# Altium PCB NEMA23.PcbDoc
Units mm, origin at the board's own origin, x right, y up, seen from the top; angles counter-clockwise.
Board outline 56 x 56 mm, 2 copper layers (Top Layer, Bottom Layer); 19 components, 9 nets, 59 pads, 26 vias.
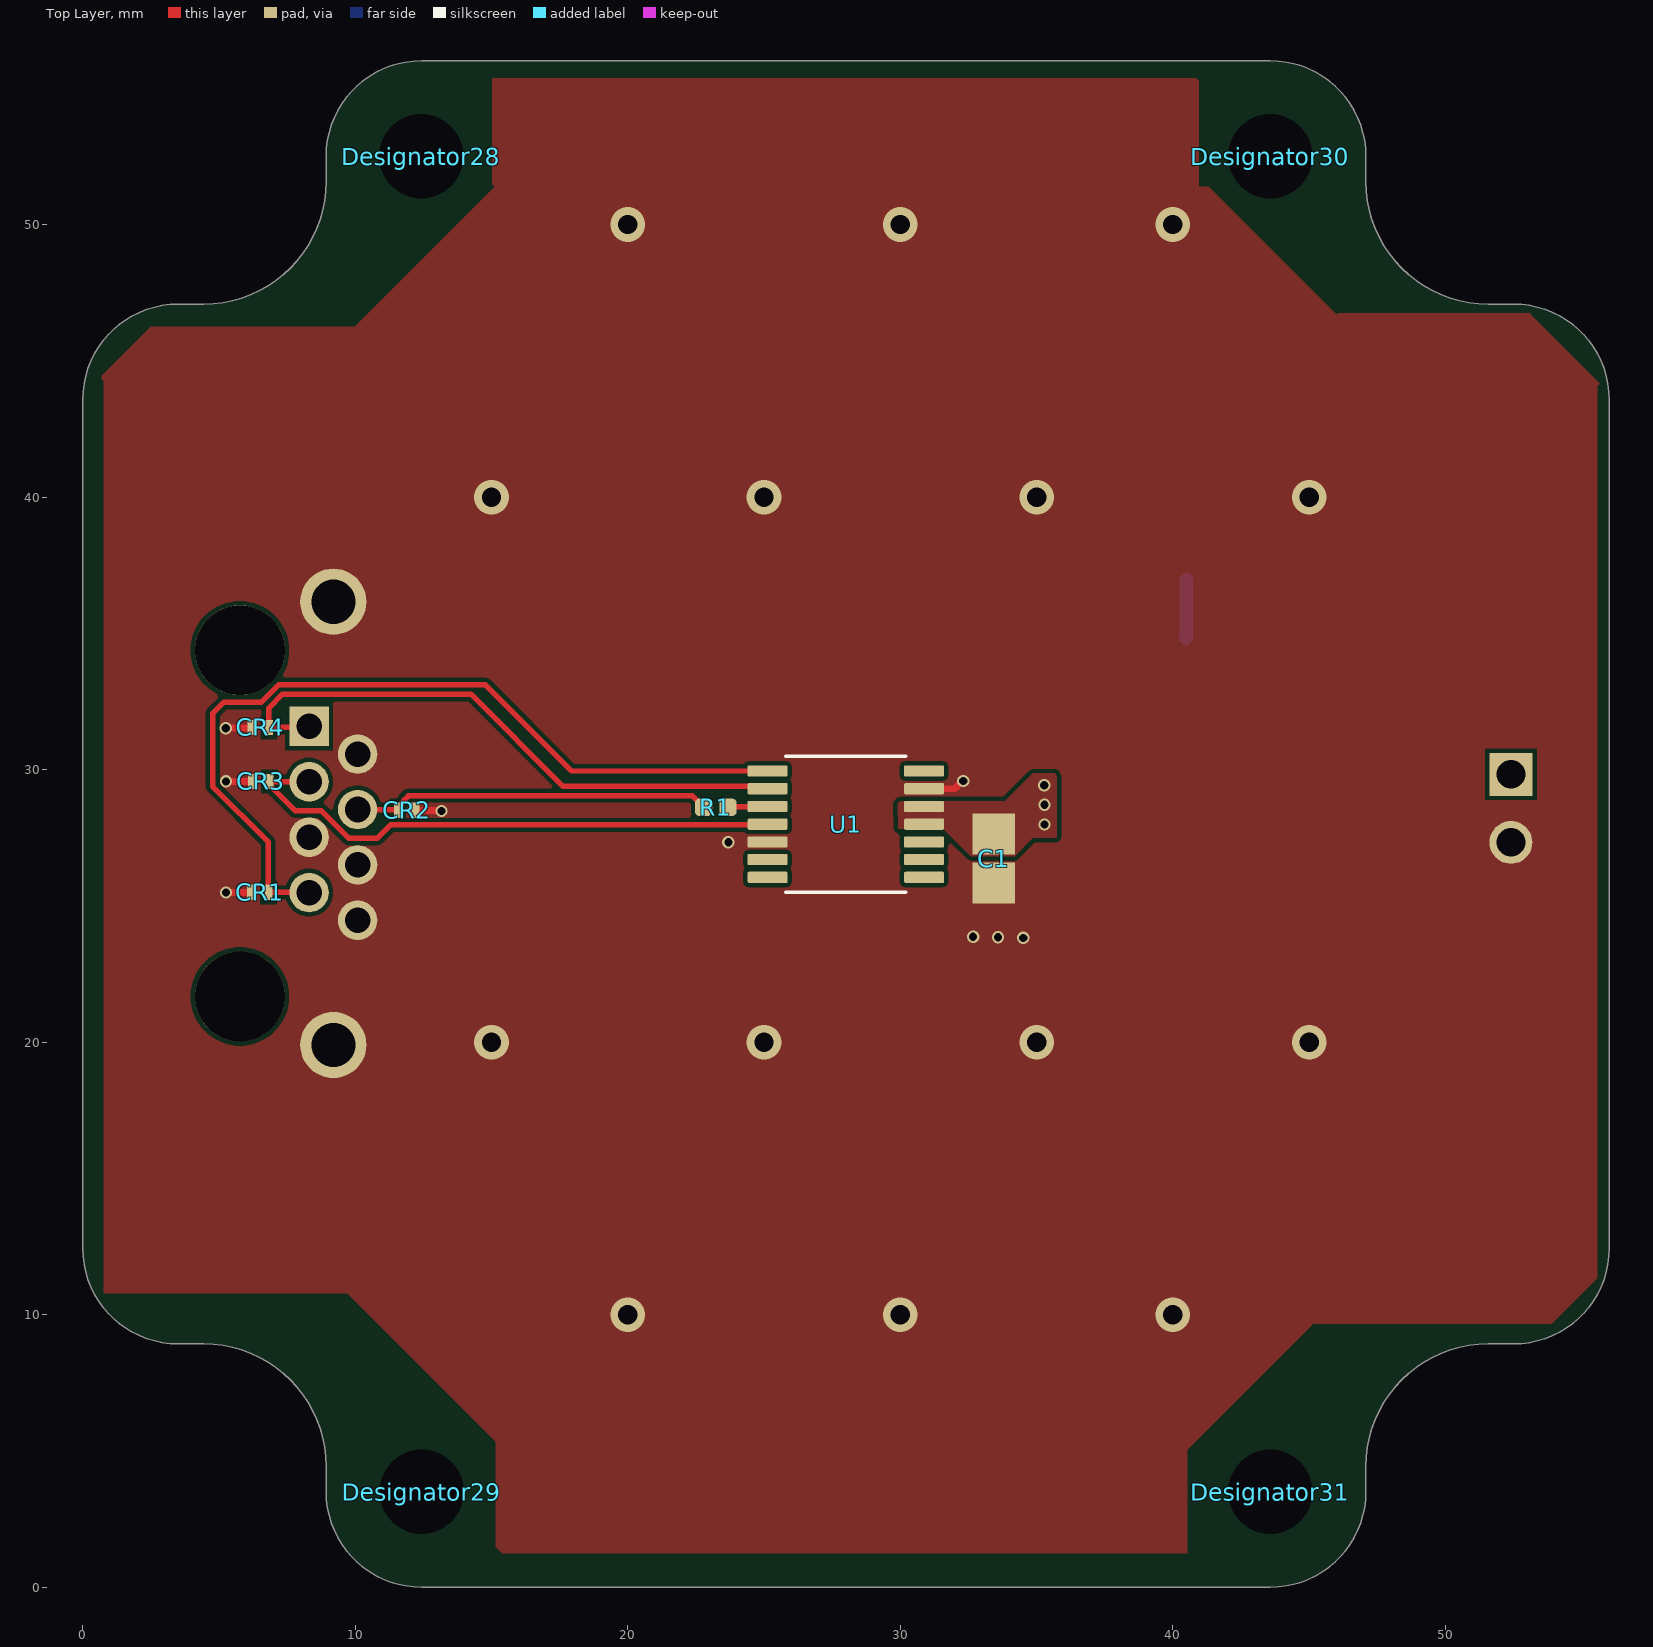
[diagram p0: Top Layer view]
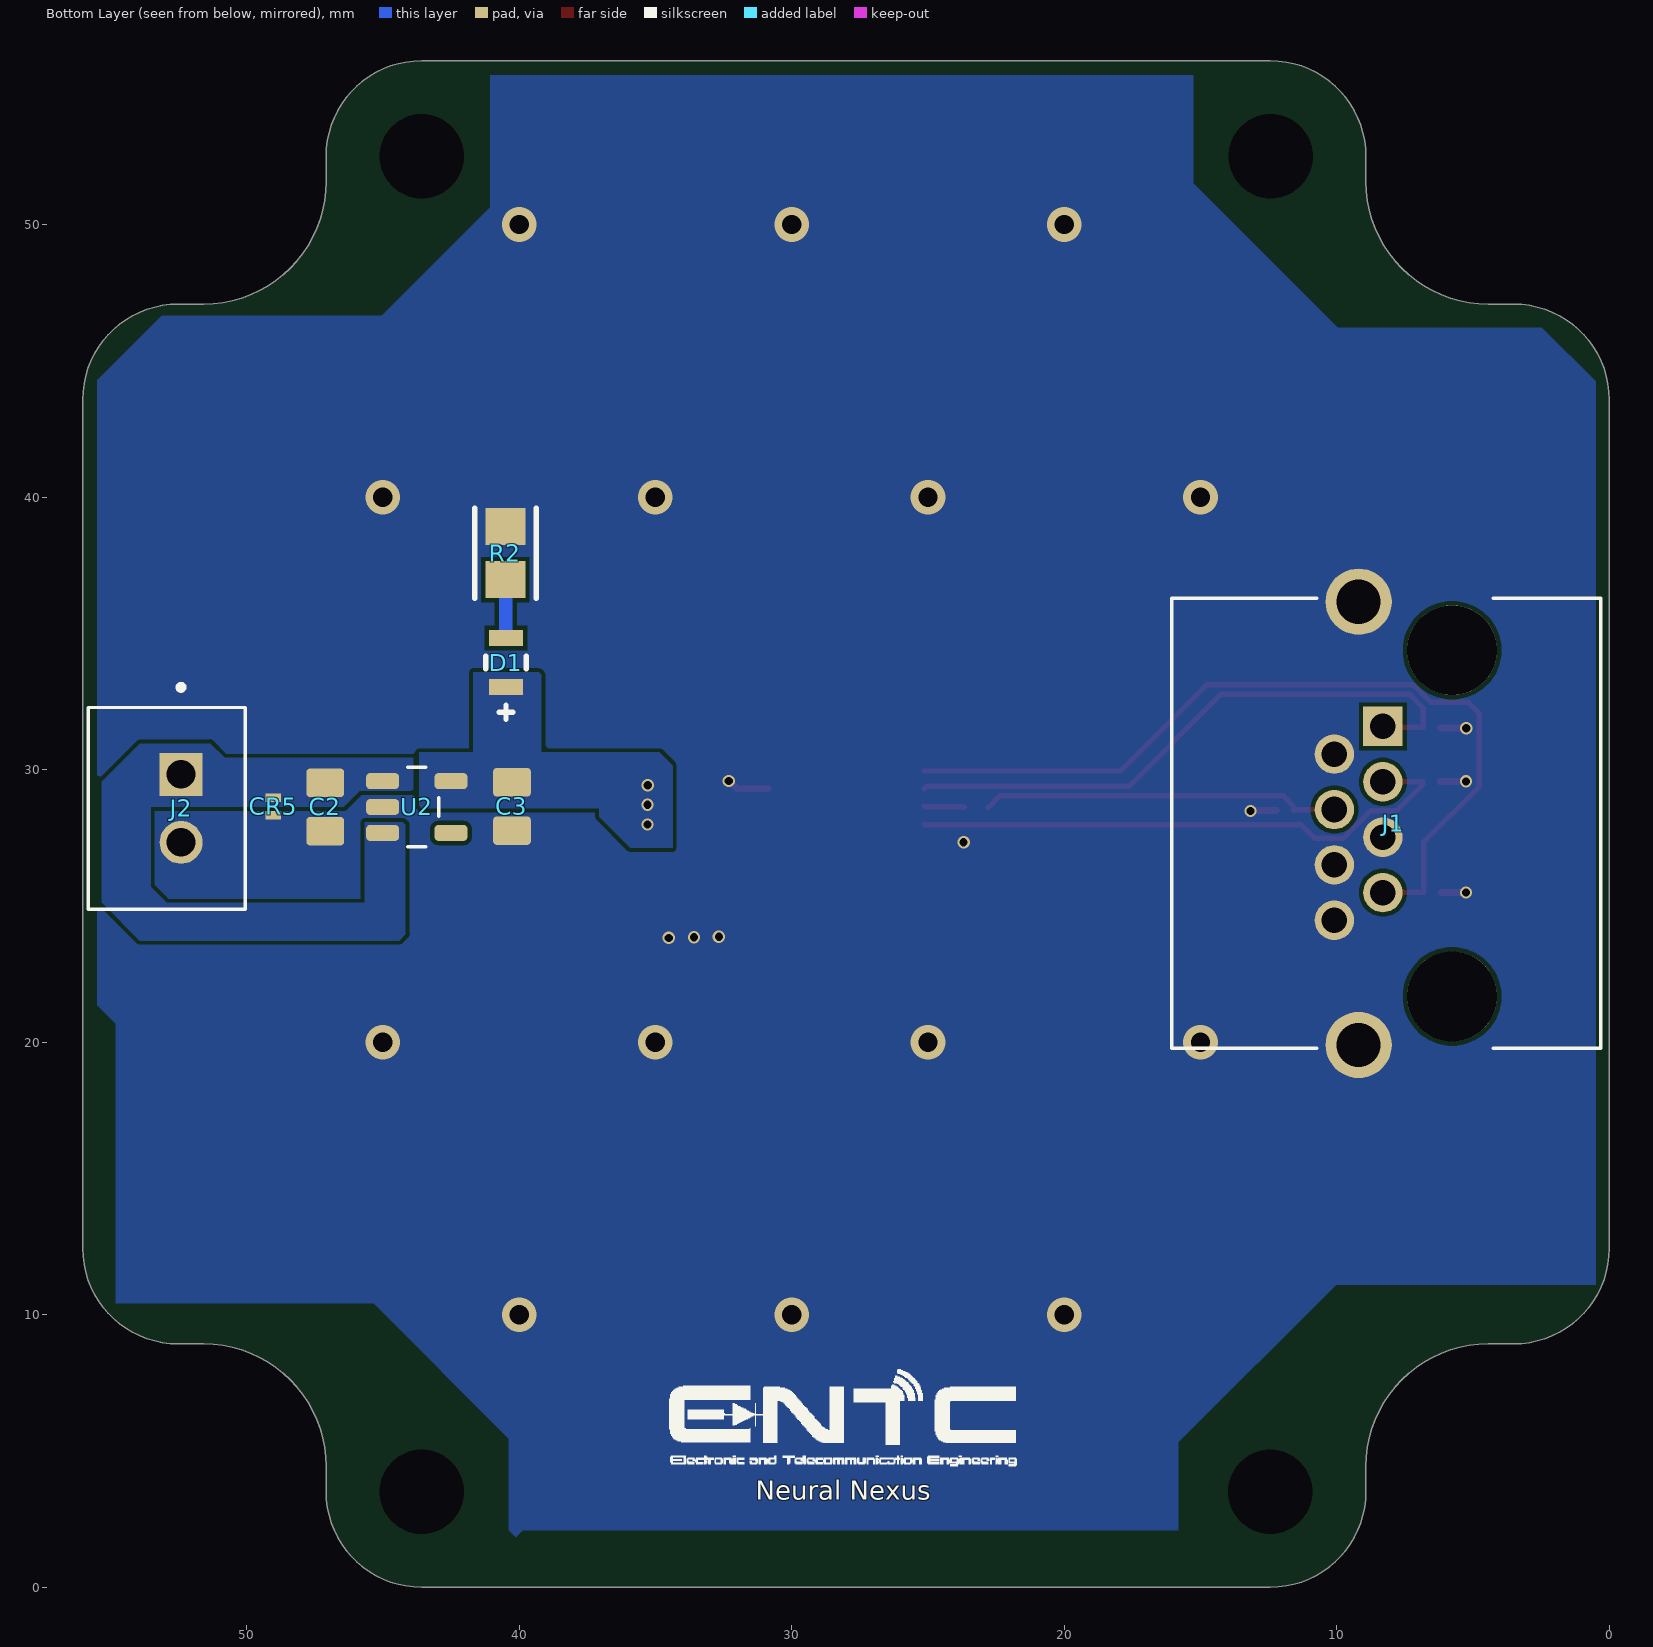
[diagram p1: Bottom Layer view, seen from below]
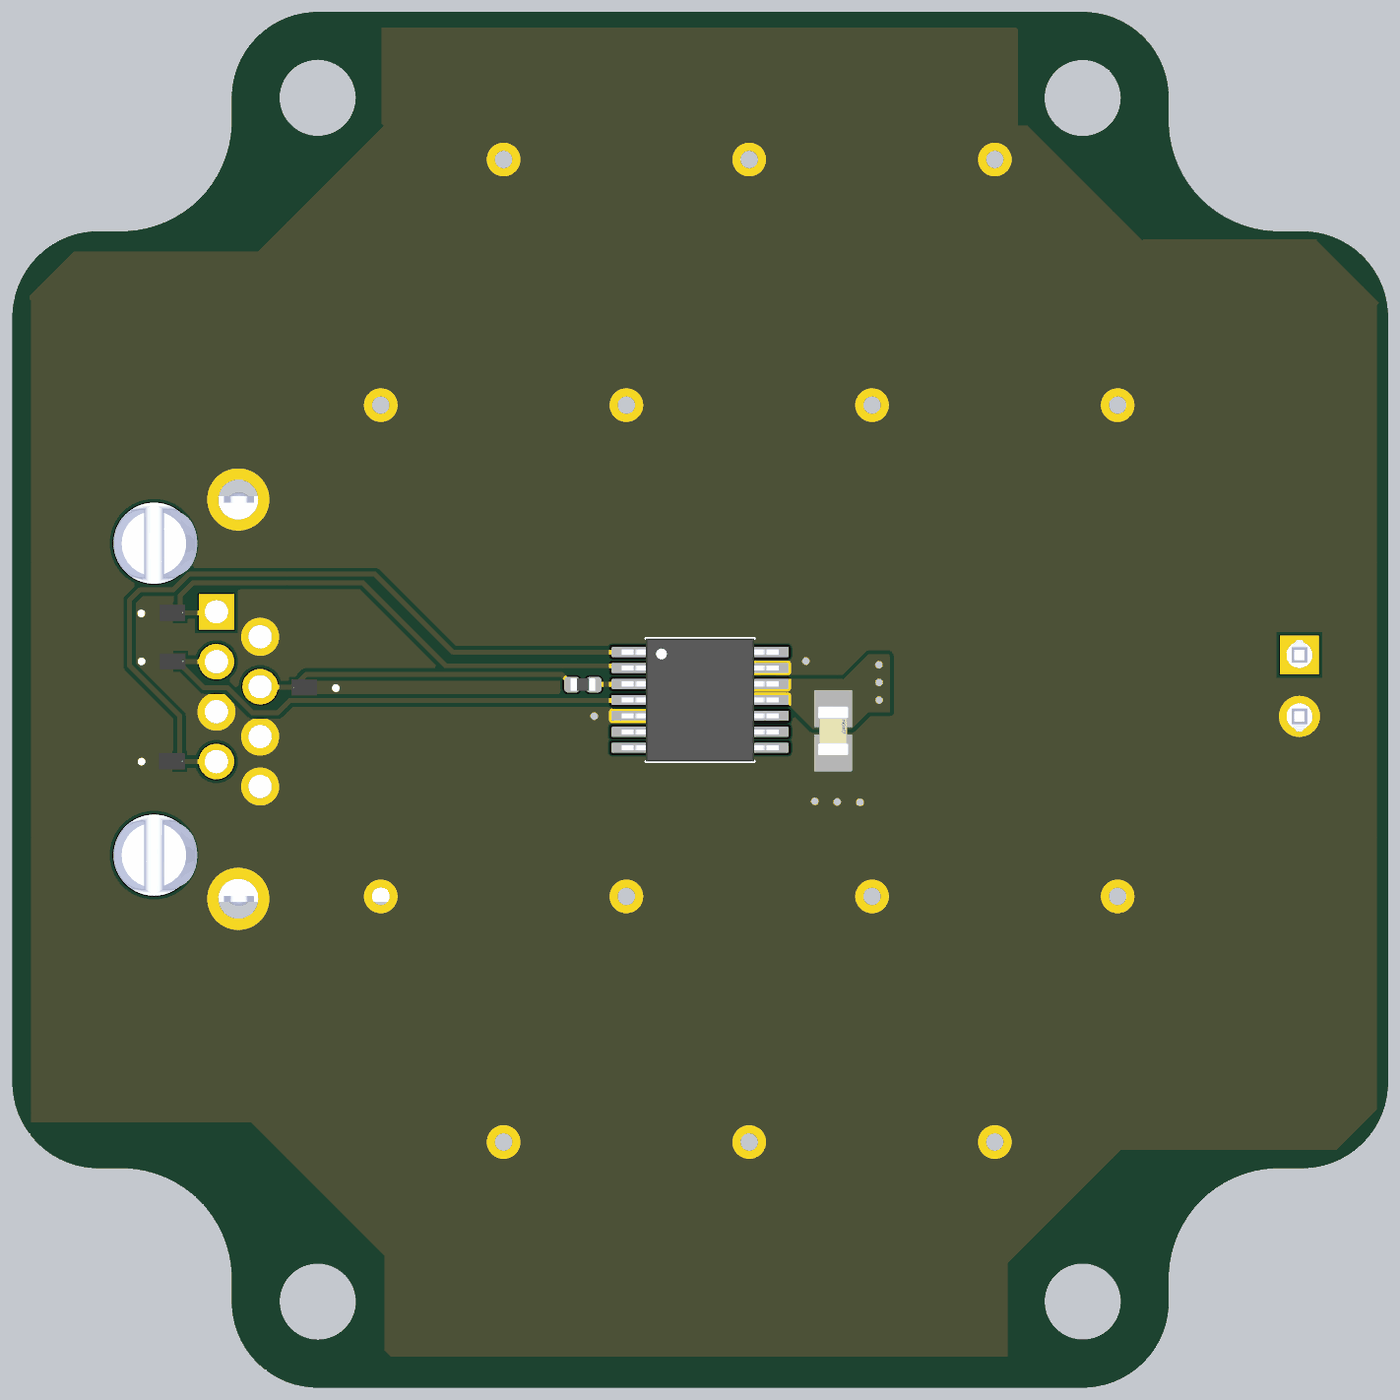
[diagram p2: 3D render of the assembled board from above, using the file's embedded part models]
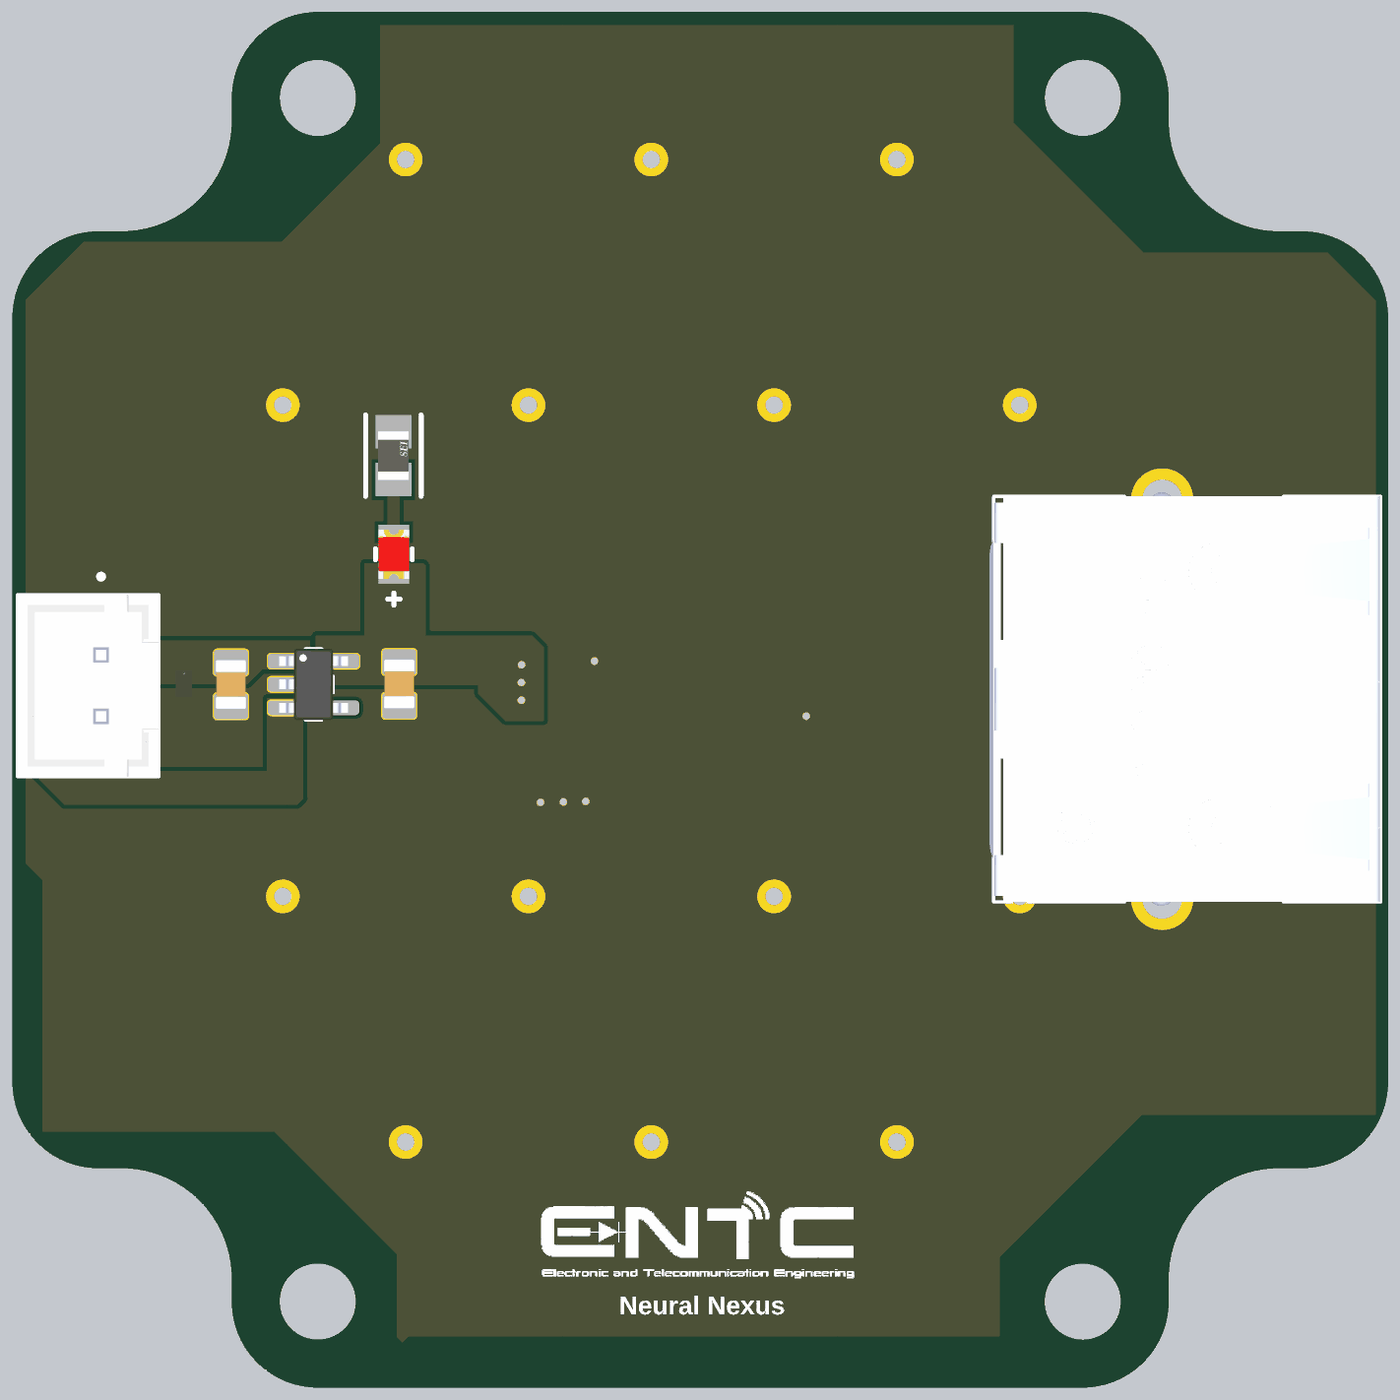
[diagram p3: 3D render of the assembled board from below, using the file's embedded part models]

## Layer stack, top to bottom
Top Solder: solder mask 0.0102, Solder Resist, Dk 3.5
Top Layer: signal copper 0.0356
Dielectric 1: dielectric 0.32, FR-4, Dk 4.8
Bottom Layer: signal copper 0.0356
Bottom Solder: solder mask 0.0102, Solder Resist, Dk 3.5

## Board outline
3.506,8.936 4.436,8.936 cw(c4.436,4.436) 8.936,4.436 8.936,3.506 ccw(c12.436,3.506) 12.436,0.006 43.576,0.006 ccw(c43.576,3.506) 47.076,3.506 47.076,4.436 cw(c51.576,4.436) 51.576,8.936 52.506,8.936 ccw(c52.506,12.436) 56.006,12.436 56.006,43.576 ccw(c52.506,43.576) 52.506,47.076 51.576,47.076 cw(c51.576,51.576) 47.076,51.576 47.076,52.506 ccw(c43.576,52.506) 43.576,56.006 12.436,56.006 ccw(c12.436,52.506) 8.936,52.506 8.936,51.576 cw(c4.436,51.576) 4.436,47.076 3.506,47.076 ccw(c3.506,43.576) 0.006,43.576 0.006,12.436 ccw(c3.506,12.436)

## Design rules (kind name [scope] priority, off if disabled: settings)
Clearance [All] p1: gap=0.15 ignorepadtopadclearanceinfootprint=FALSE
HoleSize [All] p1: absolutevalues=TRUE maxlimit=4 minlimit=0.025 maxpercent=80.000 minpercent=20.000
MinimumSolderMaskSliver [All] p1: minsoldermaskwidth=0.1
PolygonConnect PolygonConnect_3 [InNet('GND') vs InNet('GND')] p1: connectstyle=Direct reliefconductorwidth=0.254 reliefentries=4 polygonreliefangle="90 Angle" airgapwidth=0.254
PolygonConnect PolygonConnect_1 [InNet('5V') vs InNet('5V')] p2: connectstyle=Direct reliefconductorwidth=0.254 reliefentries=4 polygonreliefangle="90 Angle" airgapwidth=0.254
PolygonConnect PolygonConnect_2 [InNet('3V3') vs InNet('3V3')] p3: connectstyle=Direct reliefconductorwidth=0.254 reliefentries=4 polygonreliefangle="90 Angle" airgapwidth=0.254
PolygonConnect [All] p4: connectstyle=Relief reliefconductorwidth=0.254 reliefentries=4 polygonreliefangle="90 Angle" airgapwidth=0.254
RoutingVias [All] p1: holewidth=0.711 width=1.27 viastyle="Through Hole" minholewidth=0.3 minwidth=0.45 maxholewidth=0.711 maxwidth=1.27
SolderMaskExpansion [All] p1: expansion=0.05 istentingtop=FALSE
SupplyNets "Schematic Supply Nets_2" [InNet('GND')] p1: voltage=0.000
SupplyNets "Schematic Supply Nets_1" [InNet('3V3')] p2: voltage=0.000
SupplyNets "Schematic Supply Nets" [InNet('5V')] p3: voltage=0.000
Width [All] p1: maxlimit=1 minlimit=0.15 preferedwidth=0.254
28 further rules are at their usual default settings.

## Classes and differential pairs
component class Encoder: C1 C2 C3 CR1 CR2 CR3 CR4 CR5 D1 J1 J2 R1 R2 U1 U2

## Components (designator, comment, footprint, x,y, rotation, side; value= is the part's Value field where it differs from the comment)
C1 "100nF" FP-C0805C-DN-IPC_A 33.42,26.739 r270 top
C2 "1 uF" CAPC2012X135N 47.11,28.63 r270 bottom
C3 "2.2 uF" CAPC2012X135N 40.26,28.65 r90 bottom
CR1 "TVS" SP0402_LTF 6.5,25.5 r180 top
CR2 "TVS" SP0402_LTF 11.89,28.51 r0 top
CR3 "TVS" SP0402_LTF 6.532,29.57 r180 top
CR4 "TVS" SP0402_LTF 6.512,31.55 r180 top
CR5 "TVS" SP0402_LTF 49.02,28.65 r270 bottom
D1 "Green LED" FP-SML-LX0805SRC-TR-MFG 40.48,33.93 r90 bottom
Designator28 "Comment" MTHNP3P2MM 12.43,52.51 r0 top
Designator29 "Comment" MTHNP3P2MM 12.435,3.503 r0 top
Designator30 "Comment" MTHNP3P2MM 43.573,52.504 r0 top
Designator31 "Comment" MTHNP3P2MM 43.578,3.506 r0 top
J1 "RJ45" AMPHENOL_RJHSE5380 5.77,28.03 r90 bottom locked
J2 "B2B-XH-A" JST_B2B-XH-A 52.925,28.58 r90 bottom
R1 "22R 0402" R0402 23.23,28.62 r0 top
R2 "330R" FP-RMCF0805-IPC_A 40.5,37.946 r90 bottom
U1 "AS5047P" SOP65P640X120-14N 28,28 r0 top locked
U2 "TLV75733PDBVR" SOT95P280X145-5N 43.75,28.63 r180 bottom

## Footprints (in the part's own frame and the unit in brackets; to place one, negate y for a bottom-side part, rotate by r counter-clockwise, add the part's x,y. Pads: shape width x height; smd on the part's side, far side on the other; paste and mask are expansions set on the pad)
AMPHENOL_RJHSE5380 [mm]
  rect 1.448x1.448 / inner round 1.448 / far side rect 1.448x1.448 hole 0.94: 1(3.556,2.54)
  round 1.448 hole 0.94: 2(2.54,4.32) 3(1.524,2.54) 4(0.508,4.32) 5(-0.508,2.54) 6(-1.524,4.32) 7(-2.54,2.54) 8(-3.556,4.32)
  round 2.43 hole 1.62: SH1(-8.13,3.43) SH2(8.13,3.43)
  round 3.3 hole 3.3 unplated: ""(-6.35,0) ""(6.35,0)
  silkscreen extent -8.25,-5.46 8.25,10.29, body extent -8.42,-5.46 8.42,10.46, height 15.06
CAPC2012X135N [mm]
  rrect25% 1.05x1.38 smd: 1(-0.888,0) 2(0.888,0)
  body extent -1,-0.63 1,0.63, height 1.35
FP-C0805C-DN-IPC_A [mm]
  rect 1.505x1.556 smd paste+0 mask+0: 1(-0.901,0) 2(0.901,0)
  body extent -2.15,-1.28 2.15,1.28, height 0.25
FP-RMCF0805-IPC_A [mm]
  rect 1.355x1.462 smd paste+0 mask+0: 1(-0.976,0) 2(0.976,0)
  silkscreen extent -1.65,-1.13 1.65,1.13, body extent -1,-0.63 1,0.63, height 0.65
FP-SML-LX0805SRC-TR-MFG [mm]
  rect 0.6x1.25 smd paste+0 mask+0: 1(-0.9,0) 2(0.9,0)
  silkscreen extent -2.07,-0.75 0.22,0.75, body extent -1,-0.63 1.01,0.63, height 1.24
JST_B2B-XH-A [mm]
  rect 1.575x1.575 / inner round 1.575 / far side rect 1.575x1.575 hole 1.05: 1(1.25,-0.525)
  round 1.575 hole 1.05: 2(-1.25,-0.525)
  silkscreen extent -3.7,-2.88 4.54,2.88, body extent -3.7,-2.88 3.7,2.88, height 7
MTHNP3P2MM [mm] "Mounting Hole Non plated 3.2mm"
  round 1 hole 3.1 unplated: ""(0,0)
R0402 [mil]
  rrect50% 25x25 smd mask+2.95: 1(-17.5,0) 2(17.5,0)
  body extent -20,-10 20,10, height 16
SOP65P640X120-14N [mm]
  rrect25% 1.47x0.41 smd paste+0 mask+0.102: 1(-2.87,1.95) 2(-2.87,1.3) 3(-2.87,0.65) 4(-2.87,0) 5(-2.87,-0.65) 6(-2.87,-1.3) 7(-2.87,-1.95) 8(2.87,-1.95) 9(2.87,-1.3) 10(2.87,-0.65) 11(2.87,0) 12(2.87,0.65) 13(2.87,1.3) 14(2.87,1.95)
  silkscreen extent -2.2,-2.5 2.2,2.5, body extent -3.2,-2.5 3.2,2.5, height 1.2
SOT95P280X145-5N [mm]
  rrect50% 1.21x0.59 smd: 1(-1.255,0.95) 2(-1.255,0) 3(-1.255,-0.95) 4(1.255,-0.95) 5(1.255,0.95)
  silkscreen extent -0.33,-1.45 0.8,1.45, body extent -1.4,-1.45 1.4,1.45, height 1.45
SP0402_LTF [mil]
  rect 12x22 smd paste+0 mask-1: 1(-12.5,0) 2(12.5,0)
  body extent -21,-13 21,13, height 22

## Part data
C1: library part C0805C104K4RACTU, "Multilayer Ceramic Capacitors MLCC - SMD/SMT 16V 0.1uF X7R 0805 10%", Case Code (Imperial)=0805, Dielectric=X7R, Dielectric Material=Ceramic, Manufacturer="Yageo Group", Manufacturer Package Identifier="0805 (2012 metric)", Max Operating Temperature=125°C, Min Operating Temperature=-55°C, Supplier Part Number=399-C0805C104K4RACTUCT-ND, Temperature Coefficient=30ppm/°C, Tolerance=10%, Voltage=16V, Case/Package=0805, Category="Ceramic Capacitors", China RoHS=Compliant, ComponentLink1Description=https://datasheet.octopart.com:443/C0805C104K4RACTU-KEMET-datasheet-178445679.pdf?src-supplier=IHS, ComponentLink1URL=https://datasheet.octopart.com:443/C0805C104K4RACTU-KEMET-datasheet-178445679.pdf?src-supplier=IHS, ComponentLink2Description=https://datasheet.octopart.com:443/C0805C104K4RACTU-KEMET-datasheet-182041125.pdf?src-supplier=IHS, ComponentLink2URL=https://datasheet.octopart.com:443/C0805C104K4RACTU-KEMET-datasheet-182041125.pdf?src-supplier=IHS, ComponentLink3Description=https://datasheet.octopart.com:443/C0805C104K4RACTU-KEMET-datasheet-137357759.pdf?src-supplier=Farnell, ComponentLink3URL=https://datasheet.octopart.com:443/C0805C104K4RACTU-KEMET-datasheet-137357759.pdf?src-supplier=Farnell, ComponentLink4Description=https://datasheet.octopart.com:443/C0805C104K4RACTU-KEMET-datasheet-99356104.pdf?src-supplier=Farnell, ComponentLink4URL=https://datasheet.octopart.com:443/C0805C104K4RACTU-KEMET-datasheet-99356104.pdf?src-supplier=Farnell, ComponentLink5Description=https://datasheet.octopart.com:443/C0805C104K4RACTU-Kemet-datasheet-32036385.pdf?src-supplier=Farnell, ComponentLink5URL=https://datasheet.octopart.com:443/C0805C104K4RACTU-Kemet-datasheet-32036385.pdf?src-supplier=Farnell, ComponentLink6Description=https://datasheet.octopart.com:443/C0805C104K4RACTU-Kemet-datasheet-27203261.pdf?src-supplier=Farnell, ComponentLink6URL=https://datasheet.octopart.com:443/C0805C104K4RACTU-Kemet-datasheet-27203261.pdf?src-supplier=Farnell, ComponentLink7Description=https://datasheet.octopart.com:443/C0805C104K4RACTU-KEMET-datasheet-68331921.pdf?src-supplier=Upverter, ComponentLink7URL=https://datasheet.octopart.com:443/C0805C104K4RACTU-KEMET-datasheet-68331921.pdf?src-supplier=Upverter, ComponentLink8Description=https://datasheet.octopart.com:443/C0805C104K4RACTU-Kemet-datasheet-66076749.pdf?src-supplier=element14+APAC, ComponentLink8URL=https://datasheet.octopart.com:443/C0805C104K4RACTU-Kemet-datasheet-66076749.pdf?src-supplier=element14+APAC, ComponentLink9Description=https://datasheet.octopart.com:443/C0805C104K4RACTU-Kemet-datasheet-66552730.pdf?src-supplier=element14+APAC, ComponentLink9URL=https://datasheet.octopart.com:443/C0805C104K4RACTU-Kemet-datasheet-66552730.pdf?src-supplier=element14+APAC, ComponentLink10Description=https://datasheet.octopart.com:443/C0805C104K4RACTU-KEMET-datasheet-37550250.pdf?src-supplier=Electro+Sonic, ComponentLink10URL=https://datasheet.octopart.com:443/C0805C104K4RACTU-KEMET-datasheet-37550250.pdf?src-supplier=Electro+Sonic, ComponentLink11Description=https://datasheet.octopart.com:443/C0805C104K4RACTU-KEMET-datasheet-164512540.pdf?src-supplier=TME, ComponentLink11URL=https://datasheet.octopart.com:443/C0805C104K4RACTU-KEMET-datasheet-164512540.pdf?src-supplier=TME, ComponentLink12Description=https://datasheet.octopart.com:443/C0805C104K4RACTU-KEMET-datasheet-103094571.pdf?src-supplier=TME, ComponentLink12URL=https://datasheet.octopart.com:443/C0805C104K4RACTU-KEMET-datasheet-103094571.pdf?src-supplier=TME, ComponentLink13Description=https://datasheet.octopart.com:443/C0805C104K4RACTU-KEMET-datasheet-68331906.pdf?src-supplier=TME, ComponentLink13URL=https://datasheet.octopart.com:443/C0805C104K4RACTU-KEMET-datasheet-68331906.pdf?src-supplier=TME, ComponentLink14Description=https://datasheet.octopart.com:443/C0805C104K4RACTU-KEMET-datasheet-110724412.pdf?src-supplier=RS+(Formerly+Allied+Electronics), ComponentLink14URL=https://datasheet.octopart.com:443/C0805C104K4RACTU-KEMET-datasheet-110724412.pdf?src-supplier=RS+(Formerly+Allied+Electronics), ComponentLink15Description=https://datasheet.octopart.com:443/C0805C104K4RACTU-Kemet-datasheet-464.pdf?src-supplier=RS+(Formerly+Allied+Electronics), ComponentLink15URL=https://datasheet.octopart.com:443/C0805C104K4RACTU-Kemet-datasheet-464.pdf?src-supplier=RS+(Formerly+Allied+Electronics), ComponentLink16Description=https://datasheet.octopart.com/C0805C104K4RACTU-KEMET-datasheet-84169754.pdf, ComponentLink16URL=https://datasheet.octopart.com/C0805C104K4RACTU-KEMET-datasheet-84169754.pdf, ComponentLink17Description=https://datasheet.octopart.com:443/C0805C104K4RACTU-Kemet-datasheet-21527579.pdf?src-supplier=Newark, ComponentLink17URL=https://datasheet.octopart.com:443/C0805C104K4RACTU-Kemet-datasheet-21527579.pdf?src-supplier=Newark, ComponentLink18Description=https://datasheet.octopart.com:443/C0805C104K4RACTU-Kemet-datasheet-17019117.pdf?src-supplier=Newark, ComponentLink18URL=https://datasheet.octopart.com:443/C0805C104K4RACTU-Kemet-datasheet-17019117.pdf?src-supplier=Newark, ComponentLink19Description=https://datasheet.octopart.com:443/C0805C104K4RACTU-Kemet-datasheet-11795462.pdf?src-supplier=Arrow+Electronics, ComponentLink19URL=https://datasheet.octopart.com:443/C0805C104K4RACTU-Kemet-datasheet-11795462.pdf?src-supplier=Arrow+Electronics, ComponentLink20Description=https://datasheet.octopart.com:443/C0805C104K4RACTU-Kemet-datasheet-5313890.pdf?src-supplier=Verical, ComponentLink20URL=https://datasheet.octopart.com:443/C0805C104K4RACTU-Kemet-datasheet-5313890.pdf?src-supplier=Verical, ComponentLink21Description=https://datasheet.octopart.com:443/C0805C104K4RAC-TU-Kemet-datasheet-8203742.pdf?src-supplier=Jameco, ComponentLink21URL=https://datasheet.octopart.com:443/C0805C104K4RAC-TU-Kemet-datasheet-8203742.pdf?src-supplier=Jameco, ComponentLink22Description=http://sigma.octopart.com:80/conflict_mineral_statement/Yageo-company-3.pdf?src-supplier=Compliance+Statements, ComponentLink22URL=http://sigma.octopart.com:80/conflict_mineral_statement/Yageo-company-3.pdf?src-supplier=Compliance+Statements, ComponentLink23Description=http://sigma.octopart.com:80/rohs_statement/Yageo-company-2.pdf?src-supplier=Compliance+Statements, ComponentLink23URL=http://sigma.octopart.com:80/rohs_statement/Yageo-company-2.pdf?src-supplier=Compliance+Statements, Contact Plating=Tin, Country of Origin=Mexico, Depth=1.25mm, Export Control Classification Number (ECCN) Code=EAR99, Harmonized Tariff Schedule (HTS) Code=8532.24.00.20, Height=780µm, Introduction Date=2008-01-10, Lead Free="Lead Free", Lead Pitch=750µm, Length=2mm, Lifecycle Status=Production, Manufacturer Part Number=C0805C104K4RACTU, Material=Ceramic, Mounting Technology="Surface Mount", Number of Terminals=2, Packaging="Cut Tape", Pins=2, Pricing="1=0.16, 10=0.092, 50=0.0648, 100=0.0564, 500=0.04244, 1000=0.03815 (USD)", Radiation Hardening=No, REACH SVHC=Yes, RoHS=Compliant, Schedule B="8532240020, 8532240020|8532240020, 8532240020|8532240020|8532240020, 8532240020|8532240020|8532240020|8532240020", Stock=138662, Supplier=DigiKey, Termination=SMD/SMT, Thickness=889µm, Voltage Rating=16V, Voltage Rating (DC)=16V, Width=1.25mm
C2: library part CL21B105KAFNNNE, "1 ÂµF Â±10% 25V Ceramic Capacitor X7R 0805 (2012 Metric)", Package="SMD-2 Samsung", Check_prices=https://www.snapeda.com/parts/CL21B105KAFNNNE/Samsung/view-part/?ref=eda, MF="Samsung Electro-Mechanics", MP=CL21B105KAFNNNE, SnapEDA_Link=https://www.snapeda.com/parts/CL21B105KAFNNNE/Samsung/view-part/?ref=snap
C3: library part CL21B225KAFNNNE, "2.2 ÂµF Â±10% 25V Ceramic Capacitor X7R 0805 (2012 Metric)", Package="SMD-2 Samsung", Check_prices=https://www.snapeda.com/parts/CL21B225KAFNNNE/Samsung/view-part/?ref=eda, MF=Samsung, MP=CL21B225KAFNNNE, SnapEDA_Link=https://www.snapeda.com/parts/CL21B225KAFNNNE/Samsung/view-part/?ref=snap
CR1 CR2 CR3 CR4 CR5: library part SP0402B-ULC-01ETG, "TVS DIODE 7VWM 10VC DFN1006-2L", Manufacturer_Name="Littelfuse Inc", Copyright="Copyright (C) 2025 Ultra Librarian. All rights reserved.", Manufacturer_Part_Number=SP0402B-ULC-01ETG, RefDes=RefDes, Type=Type
D1: library part "RED GREEN", "LED RED CLEAR SMD", TRONIC part No=LE0011
J1: library part RJHSE5380, "CONN MOD JACK 8P8C R/A SHIELDED", Package=None, Availability=Unavailable, MF=Amphenol, MP=RJHSE5380, Price=None
J2: Package=None, Availability=Unavailable, MF="{'manufacturer': u'JST Sales America Inc.'}", MP=B2B-XH-A, Price=None
R1: library part SMD-RES-22R-1%-1/16W(0402), "22 Ohms Â±1% 0.063W, 1/16W Chip Resistor 0402 (1005 Metric) Moisture Resistant Thick Film", Package="0402 Yageo", Check_prices=https://www.snapeda.com/parts/RC0402FR-0722RL/Yageo/view-part/?ref=eda, MF=Yageo, MP=RC0402FR-0722RL, SnapEDA_Link=https://www.snapeda.com/parts/RC0402FR-0722RL/Yageo/view-part/?ref=snap
R2: library part CMP-26527-004125-1, "330Ω ±5% 0.125W 0805 Thick Film Chip Resistor AEC-Q200 compliant", Case Code (Imperial)=0805, Case Code (Metric)=2012, Max Operating Temperature=155°C, Max Power Dissipation=125mW, Min Operating Temperature=-55°C, Resistor Type="Thick Film", Temperature Coefficient=200ppm/°C, Tolerance=5%, Case/Package=0805, Construction=Rectangular, Contact Plating=Tin, Depth=1.25mm, Features="Automotive AEC-Q200", Height=0.026inch, Lead Free="Lead Free", Length=2mm, Military Standard=Not, Mount="Surface Mount", Number of Terminations=2, Packaging="Tape and Reel", Power Rating=125mW, Radiation Hardening=No, Resistance=330R, RoHS Compliant=Yes, Series=RMCF, Size Code=0805, Width=0.049inch
U1: library part AS5047P-ATSM, "Rotary Encoder Magnetic Programmable PWM -", Package="TSSOP-14 ams", Check_prices=https://www.snapeda.com/parts/AS5047P-ATSM/ams/view-part/?ref=eda, MF=ams, MP=AS5047P-ATSM, SnapEDA_Link=https://www.snapeda.com/parts/AS5047P-ATSM/ams/view-part/?ref=snap
U2: "1-A, low-IQ high-accuracy low-dropout (LDO) voltage regulator with enable", Package="SOT-23-5 Texas Instruments", Check_prices=https://www.snapeda.com/parts/TLV75733PDBVR/Texas+Instruments/view-part/?ref=eda, MF="Texas Instruments", MP=TLV75733PDBVR, SnapEDA_Link=https://www.snapeda.com/parts/TLV75733PDBVR/Texas+Instruments/view-part/?ref=snap

## Via types
v1: diameter 1.27, hole 0.711, Top Layer to Bottom Layer, 14 vias
v2: diameter 0.45, hole 0.3, Top Layer to Bottom Layer, 12 vias

## Nets (pads, with @x,y where several pads share a name; then routed paths per layer and width w, separated by ;. In a path a pad name is that pad's centre, name@x,y a point inside that pad or via, vN(x,y) a via of type N, cw(c..) or ccw(c..) an arc to the next point about the centre after c; other vN are vias at no path point)
3V3: C1.1 C3.2 D1.1 U1.11 U1.12 U2.5
  other v2: 35.29,27.99 35.29,28.71 35.28,29.43
5V: C2.1 CR5.1 J2.1 U2.1 U2.3
CS: CR1.1 J1.7 U1.1 | length 31
  Top Layer w0.2: J1.7 8.305,25.495 6.822,25.495 CR1.1 6.817,27.341 4.775,29.383 4.775,32.065 5.19,32.48 6.557,32.48 7.197,33.12 14.77,33.12 17.94,29.95 U1.1
GND: C1.2 C2.2 C3.1 CR1.2 CR2.2 CR3.2 CR4.2 CR5.2 J1.2 J1.5 J1.6 J1.8 J1.SH1 J1.SH2 J2.2 R2.2 U1.5 U1.13 U2.2 | length 5.4
  Top Layer w0.254: v2(5.25,31.52) 5.265,31.535 6.18,31.535 CR4.2 ; v2(5.26,25.49) 5.265,25.495 6.178,25.495 CR1.2 ; v2(5.26,29.57) CR3.2 ; CR2.2 12.223,28.495 13.155,28.495 v2(13.17,28.48) ; U1.13 31.986,29.3 32.266,29.58 v2(32.31,29.58)
  other v1: 20,10 30,10 40,10 15,20 25,20 35,20 45,20 15,40 25,40 35,40 45,40 20,50 30,50 40,50
  other v2: 34.51,23.83 33.58,23.85 32.67,23.87 23.69,27.34
MISO: CR2.1 J1.4 R1.1 | length 13.2
  Top Layer w0.2: J1.4 10.104,28.524 11.558,28.524 CR2.1 11.572,28.637 11.805,28.87 11.805,28.893 11.952,29.039 22.366,29.039 R1.1
MOSI: CR3.1 J1.3 U1.4 | length 20.9
  Top Layer w0.2: J1.3 8.302,29.562 6.858,29.562 CR3.1 6.85,29.443 7.797,28.496 8.755,28.496 9.771,27.48 10.81,27.48 11.311,27.981 25.111,27.981 U1.4
NetD1_2: D1.2 R2.1 | length 2.1
  Bottom Layer w0.5: D1.2 40.49,34.84 40.49,36.96 R2.1
NetR1_2: R1.2 U1.3 | length 1.5
  Top Layer w0.2: R1.2 23.689,28.635 25.115,28.635 U1.3
SCK: CR4.1 J1.1 U1.2 | length 22.2
  Top Layer w0.2: J1.1 8.274,31.55 CR4.1 6.83,32.258 7.342,32.77 14.25,32.77 17.631,29.389 25.041,29.389 U1.2
pads on no net: Designator28. Designator29. Designator30. Designator31. J1. U1.6 U1.7 U1.8 U1.9 U1.10 U1.14 U2.4

## Polygon pours and split planes (outlines as drawn)
GND on Bottom Layer "VEE_-5V0_L03_P-001" (solid, remove dead copper, pour order 5): 0.51,44.24 0.51,11.11 10.03,11.11 15.81,5.33 15.81,2.09 39.87,2.09 40.12,1.84 40.37,2.09 40.37,5.45 45.34,10.42 54.79,10.42 54.79,20.68 55.47,21.36 55.47,44.3 55.46,44.3 53.1,46.66 45.03,46.66 41.05,50.64 41.05,55.48 15.26,55.48 15.26,51.51 9.97,46.22 2.49,46.22
3V3 on Bottom Layer "VEE_-5V0_L03_P-001" (solid, pour order 3): 39.18,33.57 41.68,33.57 41.68,30.34 41.62,30.28 41.6,30.3 39.19,30.3
3V3 on Bottom Layer "VEE_-5V0_L03_P-001" (solid, pour order 1): 43.57,28.59 37.06,28.59 37.06,28.27 35.93,27.14 34.37,27.14 34.37,30.15 34.85,30.63 43.66,30.63 43.66,28.68
5V on Bottom Layer "VEE_-5V0_L03_P-001" (solid, pour order 0): 53.52,28.63 46.44,28.63 45.84,29.23 43.98,29.23 43.89,29.14 43.89,30.43 50.8,30.43 51.34,30.97 51.36,30.95 53.91,30.95 55.31,29.55 55.31,25.11 55.29,25.11 53.91,23.73 44.4,23.73 44.15,23.98 44.17,24 44.17,28 44.19,28 44.26,28.07 45.66,28.07 45.66,25.11 52.92,25.11 53.52,25.71
GND on Top Layer "VEE_-5V0_L03_P-001" (solid, remove dead copper, pour order 6): 2.41,46.16 2.5,46.25 9.99,46.25 15.12,51.38 15.03,51.47 15.03,55.37 40.95,55.37 40.99,55.33 40.95,55.29 40.95,51.38 41.31,51.38 45.99,46.7 46.04,46.75 53.11,46.75 53.11,46.7 55.65,44.16 55.56,44.07 55.56,11.34 53.9,9.68 45.15,9.68 40.525,5.055 40.525,1.26 15.4,1.26 15.16,1.5 15.16,5.35 9.71,10.8 0.77,10.8 0.77,44.25 0.635,44.385
3V3 on Top Layer "VEE_-5V0_L03_P-001" (solid, pour order 4): 29.91,28.85 33.79,28.85 33.82,28.82 34.86,29.86 35.67,29.86 35.69,29.88 35.74,29.83 35.74,27.5 34.86,27.5 34.17,26.81 34.16,26.82 32.58,26.82 31.57,27.83 29.92,27.83

## Silkscreen, mask and mechanical layers (free items; w line width, h text height)
Bottom Overlay:
  drawing of 40 lines, arcs and shapes, not listed
  text "Neural Nexus" at 31.31,2.984 h1.2
Mechanical 1:
  circle w0.013: c43.576,3.506 r1.55
  circle w0.013: c12.436,3.506 r1.55
  circle w0.013: c12.436,52.506 r1.55
  circle w0.013: c43.576,52.506 r1.55
  lines w0.013: 0.006,12.436 ccw(c3.506,12.436) 3.506,8.936 4.436,8.936 cw(c4.436,4.436) 8.936,4.436 8.936,3.506 ccw(c12.436,3.506) 12.436,0.006 43.576,0.006 ccw(c43.576,3.506) 47.076,3.506 47.076,4.436 cw(c51.576,4.436) 51.576,8.936 52.506,8.936 ccw(c52.506,12.436) 56.006,12.436 56.006,43.576 ccw(c52.506,43.576) 52.506,47.076 51.576,47.076 cw(c51.576,51.576) 47.076,51.576 47.076,52.506 ccw(c43.576,52.506) 43.576,56.006 12.436,56.006 ccw(c12.436,52.506) 8.936,52.506 8.936,51.576 cw(c4.436,51.576) 4.436,47.076 3.506,47.076 ccw(c3.506,43.576) 0.006,43.576 0.006,12.436